# Altium PCB EEPROM_Programmer.PcbDoc
Units mil, origin at the board's own origin, x right, y up, seen from the top; angles counter-clockwise.
Board outline 1655 x 1780 mil, 2 copper layers (Top Layer, Bottom Layer); 4 components, 31 nets, 90 pads, 11 vias.
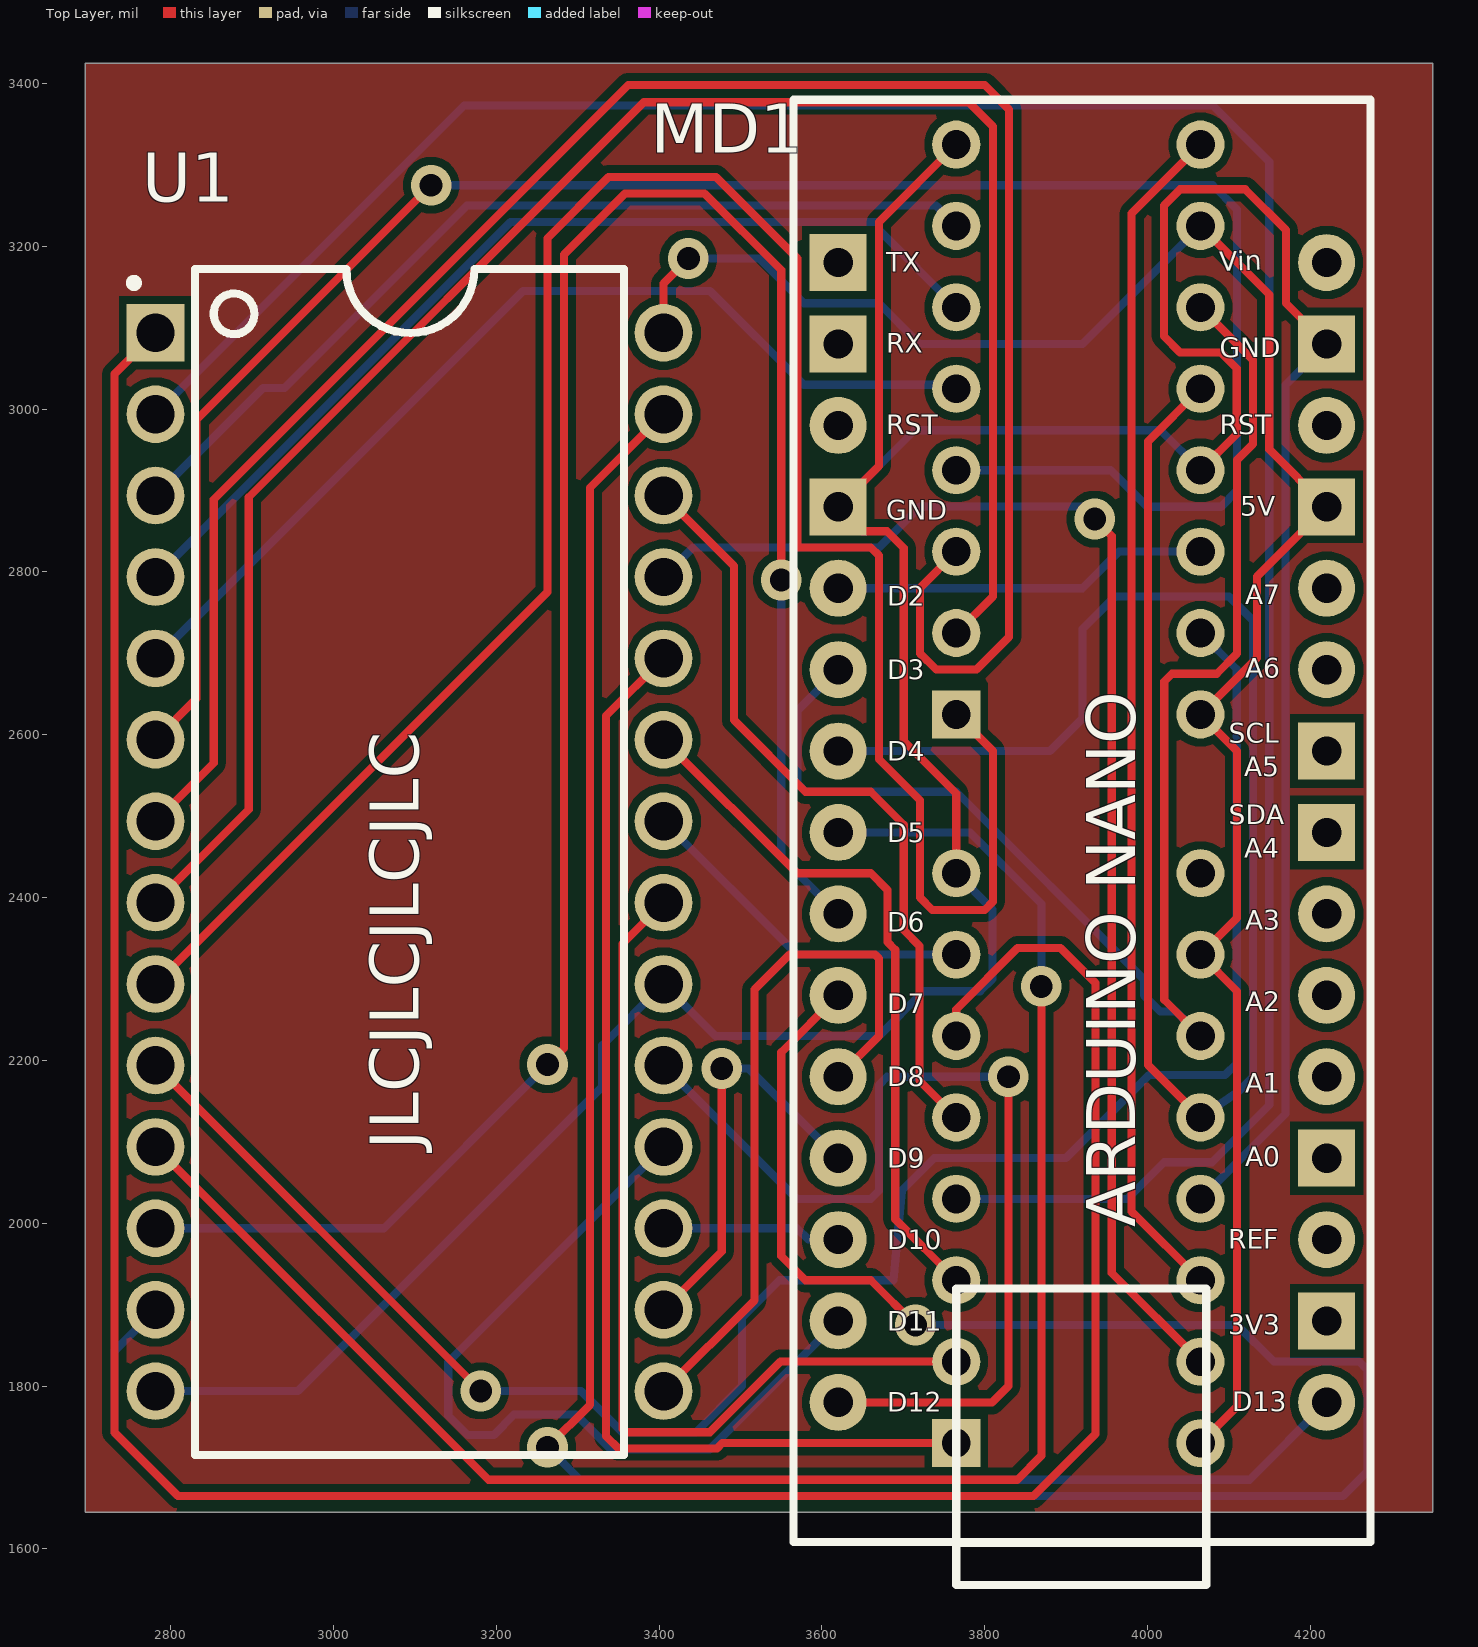
[diagram p0: Top Layer view]
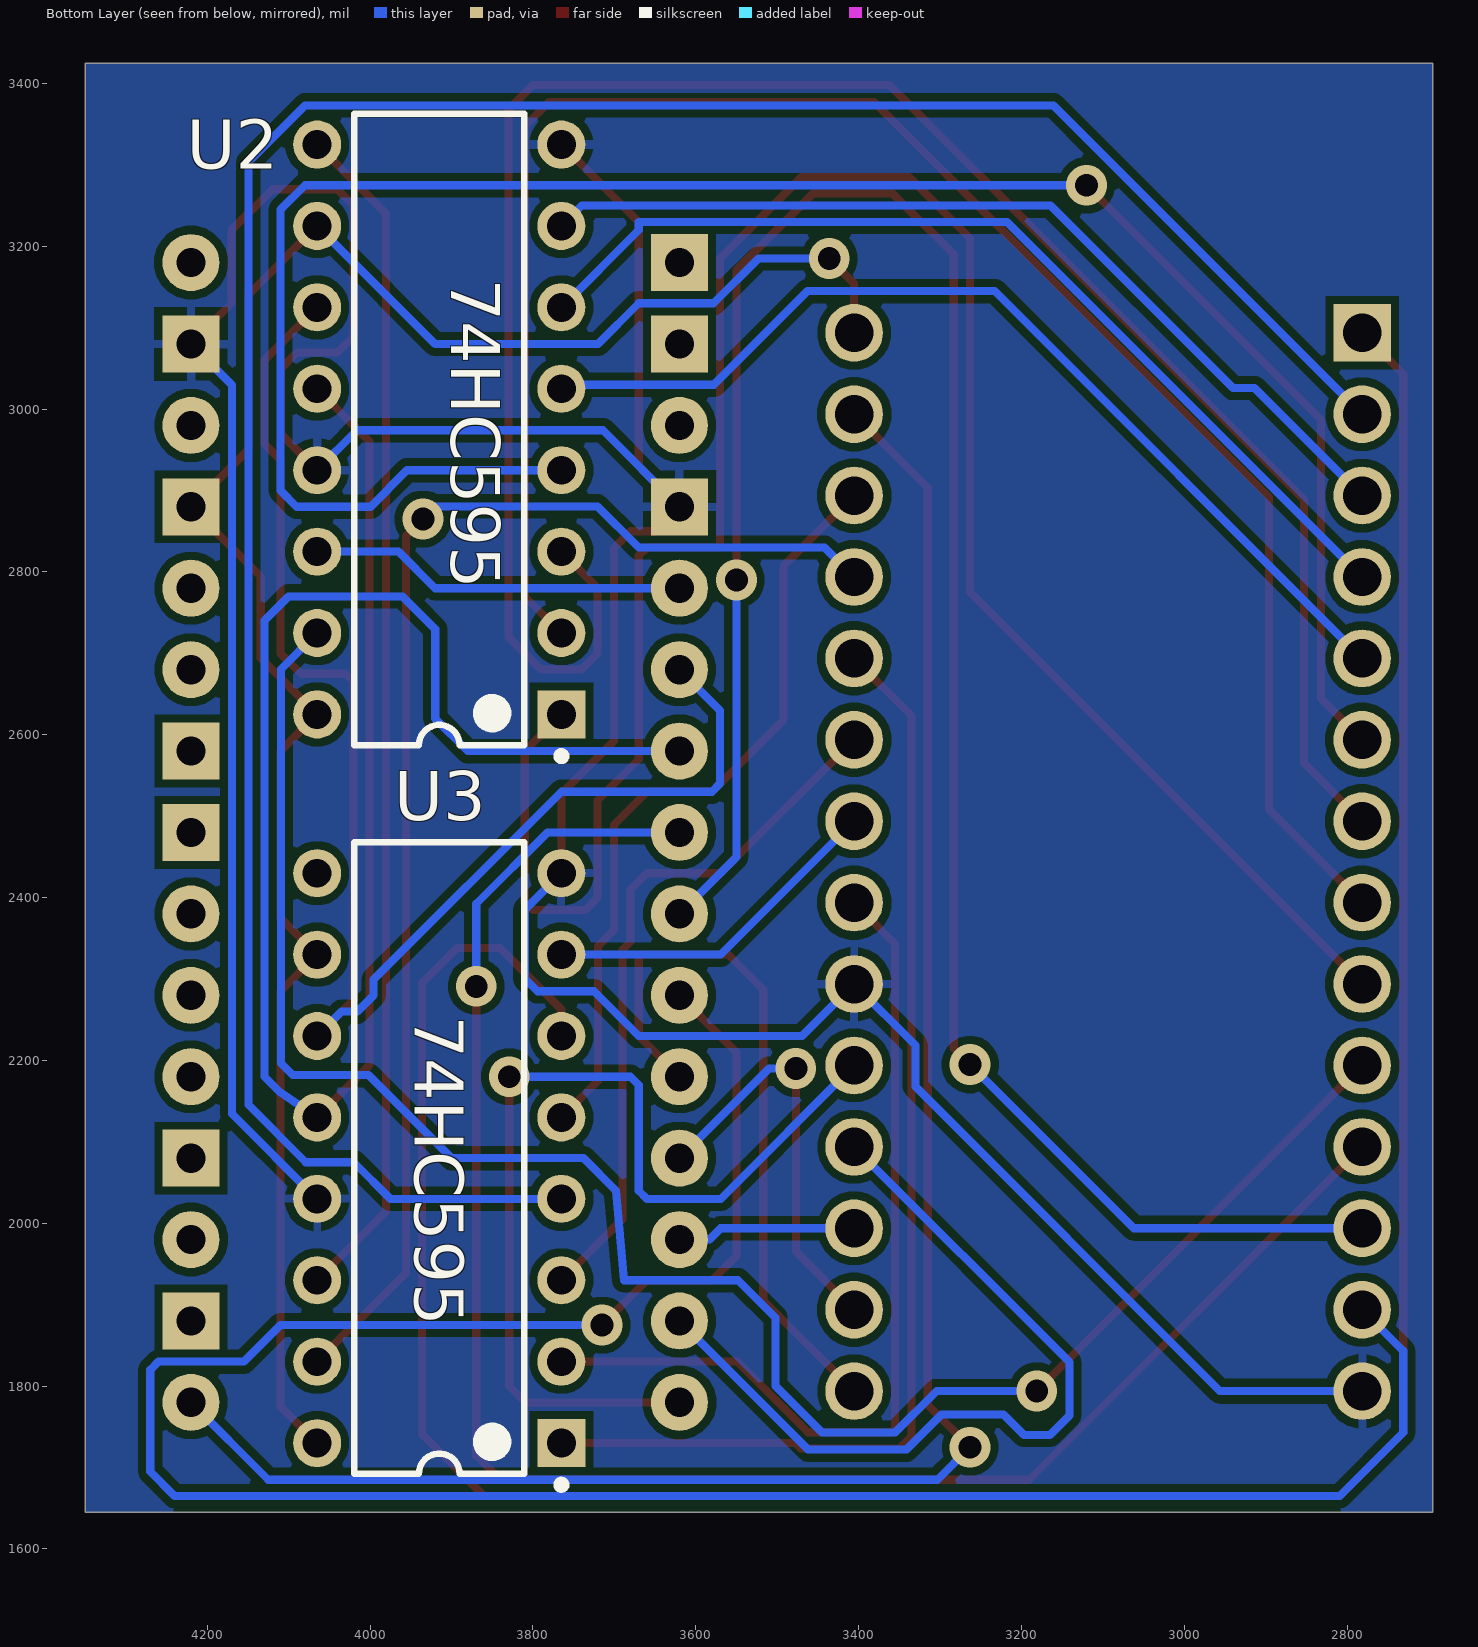
[diagram p1: Bottom Layer view, seen from below]

## Layer stack, top to bottom
Top Solder: solder mask 0.4, Solder Resist, Dk 3.5
Top Layer: signal copper 1.4
Dielectric 1: dielectric 12.6, FR-4, Dk 4.8
Bottom Layer: signal copper 1.4
Bottom Solder: solder mask 0.4, Solder Resist, Dk 3.5

## Board outline
2695,1645 2695,3425 4350,3425 4350,1645

## Design rules (kind name [scope] priority, off if disabled: settings)
Clearance [All] p1: gap=10 ignorepadtopadclearanceinfootprint=FALSE except(0: Arc-Hole Track-Hole SMDPad-Hole THPad-Hole Via-Hole Fill-Hole Poly-Hole Region-Hole Text-Hole)
PolygonConnect [All] p1: connectstyle=Relief reliefconductorwidth=10 reliefentries=4 polygonreliefangle="90 Angle" airgapwidth=10
RoomDefinition EEPROM_Programmer [InComponentClass('EEPROM_Programmer')] p1: confinementstyle=ConfineIn formatcopy=TRUE lockcomponents=FALSE outline 2695,1490 4350.45,1490 4350.45,3425 2695,3425
RoutingVias [All] p1: holewidth=28 width=50 viastyle="Through Hole" minholewidth=28 minwidth=50 maxholewidth=28 maxwidth=50
SolderMaskExpansion SolderMaskExpansion_1 [IsVia] p1: expansion=4 istentingtop=TRUE
SolderMaskExpansion [All] p2: expansion=4 istentingtop=FALSE
Width [All] p1: maxlimit=10 minlimit=10 preferedwidth=10
30 further rules are at their usual default settings.

## Classes and differential pairs
component class EEPROM_Programmer: MD1 U2 U3

## Components (designator, comment, footprint, x,y, rotation, side; value= is the part's Value field where it differs from the comment)
MD1 "Arduino Nano" ARDUINO_NANO 3915,2490 r0 top
U1 "AT28C256" DIP_28 3085,2465 r270 top
U2 "SN74HC595N" N0016A 3915,2975 r0 bottom
U3 "SN74HC595N" N0016A 3915,2080 r0 bottom

## Footprints (in the part's own frame and the unit in brackets; to place one, negate y for a bottom-side part, rotate by r counter-clockwise, add the part's x,y. Pads: shape width x height; smd on the part's side, far side on the other; paste and mask are expansions set on the pad)
ARDUINO_NANO [mil]
  rect 70x70 hole 36: 1(-295,690) 2(-295,590) 4(-295,390) 17(305,-610) 19(305,-410) 23(305,-10) 24(305,90) 27(305,390) 29(305,590)
  round 70 hole 36: 3(-295,490) 5(-295,290) 6(-295,190) 7(-295,90) 8(-295,-10) 9(-295,-110) 10(-295,-210) 11(-295,-310) 12(-295,-410) 13(-295,-510) 14(-295,-610) 15(-295,-710) 16(305,-710) 18(305,-510) 20(305,-310) 21(305,-210) 22(305,-110) 25(305,190) 26(305,290) 28(305,490) 30(305,690)
  silkscreen extent -350,-934 359,890, body extent -351,-935 361,890, height 433
DIP_28 [mm]
  rect 1.8x1.8 hole 1.2: 1(-15.972,-7.71)
  round 1.8 hole 1.2: 2(-13.432,-7.71) 3(-10.892,-7.71) 4(-8.352,-7.71) 5(-5.812,-7.71) 6(-3.272,-7.71) 7(-0.732,-7.71) 8(1.808,-7.71) 9(4.348,-7.71) 10(6.888,-7.71) 11(9.428,-7.71) 12(11.968,-7.71) 13(14.508,-7.71) 14(17.048,-7.71) 15(17.048,8.139) 16(14.508,8.139) 17(11.968,8.139) 18(9.428,8.139) 19(6.888,8.139) 20(4.348,8.139) 21(1.808,8.139) 22(-0.732,8.139) 23(-3.272,8.139) 24(-5.812,8.139) 25(-8.352,8.139) 26(-10.892,8.139) 27(-13.432,8.139) 28(-15.972,8.139)
  silkscreen extent -17.96,-8.51 19.04,6.91, body extent -18.67,-6.42 19.43,6.93, height 4.83
N0016A [mm] "DIP, 16-Leads, Body 19.7x6.6mm, Pitch 2.54mm"
  rect 1.5x1.5 hole 0.9: 1(-3.81,8.89)
  round 1.5 hole 0.9: 2(-3.81,6.35) 3(-3.81,3.81) 4(-3.81,1.27) 5(-3.81,-1.27) 6(-3.81,-3.81) 7(-3.81,-6.35) 8(-3.81,-8.89) 9(3.81,-8.89) 10(3.81,-6.35) 11(3.81,-3.81) 12(3.81,-1.27) 13(3.81,1.27) 14(3.81,3.81) 15(3.81,6.35) 16(3.81,8.89)
  silkscreen extent -3.93,-9.85 2.65,10.31, body extent -3.95,-9.85 3.95,9.85, height 5.08

## Part data
MD1: library part Arduino_Nano, "Arduino Nano board"
U1: "Paged Parallel EEPROM AT28C256"
U2 U3: library part CMP-0780-00137-3, "8-Bit Shift Registers With 3-State Output Registers, N0016A, TUBE", F @ Nom Voltage(Max)(Mhz)=28, Generic Part Number=SN74HC595, ICC @ Nom Voltage(Max)(mA)=0.08, Manufacturer="Texas Instruments", Operating Temperature Range(C)="-40 to 85", Rating=Military, tpd @ Nom Voltage(Max)(ns)=34, Voltage(Nom)(V)=6, 3-State Output=Yes, Bits=8, Code_JEDEC=MS-001, DatasheetVersion=SCLS041H, Input Type=CMOS, Output Drive (IOL/IOH)(Max)(mA)=7.8/-7.8, Output Type=CMOS, PackageReference=N0016A, PackageVersion=http://www.ti.com/lit/ml/mpdi002c/mpdi002c.pdf, Technology Family=HC, VCC(Max)(V)=6, VCC(Min)(V)=2

## Via types
v1: diameter 50, hole 28, Top Layer to Bottom Layer, tented both sides, 11 vias

## Nets (pads, with @x,y where several pads share a name; then routed paths per layer and width w, separated by ;. In a path a pad name is that pad's centre, name@x,y a point inside that pad or via, vN(x,y) a via of type N, cw(c..) or ccw(c..) an arc to the next point about the centre after c; other vN are vias at no path point)
+5: MD1.27 U1.28 U2.10 U2.16 U3.10 U3.16 | length 2534.4
  Top Layer w10: U1.28 3405.45,3154.45 v1(3436,3185) ; U3.16 4110,1775 4110,2285 U3.10 4110,2375 4110,2580 U2.16 4134.26,2694.26 4134.26,2794.26 MD1.27 4149.53,2950.47 4149.53,3140.47 U2.10
  Bottom Layer w10: v1(3436,3185) 3523,3185 3578,3130 3670,3130 3720,3080 3920,3080 U2.10
D0: MD1.8 U1.11 | length 2233.4
  Top Layer w10: U1.11 3190.29,1685 3840,1685 3869.53,1714.53 v1(3869.53,2291)
  Bottom Layer w10: MD1.8 3782,2480 3869.53,2392.47 v1(3869.53,2291)
D1: MD1.9 U1.12 | length 2725.1
  Top Layer w10: v1(3263,2195) 3283,2215 3283,3189.92 3358.08,3265 3456,3265 3550,3171 v1(3550,2790)
  Bottom Layer w10: U1.12 3061.82,1993.82 v1(3263,2195) ; v1(3550,2790) 3550,2450 MD1.9
D2: MD1.10 U1.13 | length 3007.4
  Top Layer w10: MD1.10 3550,2210 3550,1960 3580,1930 3660,1930 v1(3715,1875)
  Bottom Layer w10: U1.13 2731,1843.35 2731,1743 2809,1665 4240,1665 4270,1695 4270,1820 4260,1830 4155,1830 4110,1875 v1(3715,1875)
D3: MD1.11 U1.15 | length 878
  Top Layer w10: U1.15 3517,1905.37 3517,2287 3560,2330 3665,2330 3670,2325 3670,2230 MD1.11
D4: MD1.12 U1.16 | length 514.4
  Top Layer w10: U1.16 3477,1965.37 v1(3477,2190)
  Bottom Layer w10: v1(3477,2190) 3510,2190 MD1.12
D5: MD1.13 U1.17 | length 220.3
  Bottom Layer w10: U1.17 3569.47,1993.82 3583.29,1980 MD1.13
D6: MD1.14 U1.18 | length 1021.9
  Bottom Layer w10: U1.18 3141,1829.37 3141,1764 3165,1740 3197,1740 3222,1765 3298,1765 3341,1722 3462,1722 MD1.14
D7: MD1.15 U1.19 | length 1227
  Top Layer w10: MD1.15 3809,1780 3829,1800 v1(3829,2180)
  Bottom Layer w10: U1.19 3569.27,2030 3660,2030 3670,2040 3670,2170 3680,2180 v1(3829,2180)
GND: MD1.4 MD1.29 U1.14 U1.20 U2.8 U2.13 U3.8 U3.13 | length 4869.5
  Top Layer w10: U3.8 3765,2527.89 3700.47,2592.42 3700.47,2829.53 3680,2850 3650,2850 MD1.4 3670,2930 3670,3230 U2.8 ; U2.13 4109.53,2969.53 4109.53,3050 4090,3069.53 4040,3069.53 4020,3089.53 4020,3250 4040,3270 4120,3270 4170,3220 4170,3130 MD1.29
  Bottom Layer w10: U1.14 2956.32,1793.82 3330.27,2167.77 3330.27,2218.64 U1.20 3469.27,2230 3670,2230 3725,2285 3794.53,2285 3809.53,2300 3809.53,2385.47 U3.8 ; MD1.4 3714,2974 4016,2974 U2.13 ; U3.13 4169.53,2134.53 4169.53,3029.53 MD1.29
NetU1_1: U1.1 U3.6 | length 3447.2
  Top Layer w10: U1.1 2731,3043.37 2731,1743 2809,1665 3860,1665 3936,1741 3936,2295 3893,2338 3840.26,2338 3765,2262.74 U3.6
NetU1_2: U1.2 U3.4 | length 3144.2
  Bottom Layer w10: U1.2 3160.65,3373 4080,3373 4149.53,3303.47 4149.53,2145.53 4079,2075 4020,2075 3975,2030 U3.4
NetU1_3: U1.3 U2.7 | length 1141.4
  Bottom Layer w10: U1.3 2913.56,3025.91 2940,3025.91 3164.09,3250 3740,3250 U2.7
NetU1_4: U1.4 U2.6 | length 1213.6
  Bottom Layer w10: U1.4 3217.65,3230 3670,3230 3670,3220 U2.6
NetU1_5: U1.5 U2.5 | length 1223
  Bottom Layer w10: U1.5 3232.65,3145 3462.63,3145 3577.63,3030 3765,3030 U2.5
NetU1_6: U1.6 U2.4 | length 2540.8
  Top Layer w10: U1.6 2832,2644.35 2832,2987 v1(3120,3275)
  Bottom Layer w10: v1(3120,3275) 4080,3275 4110,3245 4110,2900 4090,2880 3999.67,2880 3954.67,2925 U2.4
NetU1_7: U1.7 U2.3 | length 2550.9
  Top Layer w10: U1.7 2853,2565.35 2853,2888.92 3362.08,3398 3800,3398 3830,3368 3830,2720 3790,2680 3740.47,2680 3720.47,2700 3720.47,2780.47 U2.3
NetU1_8: U1.8 U2.2 | length 2313.4
  Top Layer w10: U1.8 2896,2508.35 2896,2891.76 3381.24,3377 3780,3377 3810,3347 3810,2770 U2.2
NetU1_9: U1.9 U2.1 | length 2743.7
  Top Layer w10: U1.9 3263,2775.35 3263,3209.92 3338.08,3285 3470,3285 3570,3185 3570,2830 3660,2830 3670,2820 3670,2570 3720.47,2519.53 3720.47,2400 3735.47,2385 3800,2385 3810,2395 3810,2580 U2.1
NetU1_10: U1.10 U2.15 | length 2353.8
  Top Layer w10: U1.10 3181,1794.29 v1(3181,1794)
  Bottom Layer w10: v1(3181,1794) 3304,1794 3355,1743 3445,1743 3502,1800 3502,1884 3548,1930 3688,1930 3698,2040 3738,2080 3900,2080 4002,2182 4095,2182 4109.53,2196.53 4109.53,2680.47 U2.15
NetU1_21: U1.21 U3.2 | length 1114.9
  Top Layer w10: U1.21 3355.02,2343.39 3355.02,1747.37 3359,1743.39 3462.39,1743.39 3549,1830 U3.2
NetU1_22: U1.22 U3.7 | length 427.4
  Bottom Layer w10: U1.22 3569.27,2330 U3.7
NetU1_23: U1.23 U3.3 | length 865.9
  Top Layer w10: U1.23 3569.27,2430 3660,2430 3680.47,2409.53 3680.47,2345.47 3690,2335.94 3690,2005 U3.3
NetU1_24: U1.24 U3.1 | length 1423.6
  Top Layer w10: U1.24 3335.02,2623.39 3335.02,1738.37 3350,1723.39 3471,1723.39 3477.61,1730 U3.1
NetU1_25: U1.25 U3.15 | length 1660.7
  Top Layer w10: v1(3935,2865) 3956,2844 3956,1939 U3.15
  Bottom Layer w10: U1.25 3441.63,2830 3670,2830 3720.47,2880.47 3919.53,2880.47 v1(3935,2865)
NetU1_26: U1.26 U3.5 | length 959.6
  Top Layer w10: U1.26 3492,2807.27 3492,2618 3580,2530 3660,2530 3700.47,2489.53 3700.47,2360 3720,2340.47 3720,2175 U3.5
NetU2_9: U2.9 U3.14 | length 1465
  Top Layer w10: U3.14 3980.47,2014.53 3980.47,3240.47 U2.9
RCLK: MD1.7 U2.12 U3.12 | length 2255.8
  Top Layer w10: U3.12 4000.47,2194.53 4000.47,2960.47 U2.12
  Bottom Layer w10: MD1.7 3880,2580 3920,2620 3920,2730 3960,2770 4100,2770 4129.53,2740.47 4129.53,2180 4111.53,2162 U3.12
SER1: MD1.5 U2.14 | length 463.6
  Bottom Layer w10: MD1.5 3920,2780 3965,2825 U2.14
SRCLK: MD1.6 U2.11 U3.11 | length 1813.1
  Top Layer w10: U3.11 4020.47,2274.53 4020.47,2665.47 4030,2675 4085,2675 4110,2700 4110,2937.74 4129.53,2957.26 4129.53,3060.47 U2.11
  Bottom Layer w10: MD1.6 3570,2630 3570,2540 3580,2530 3765,2530 3995.57,2299.43 3995.57,2280 4015.57,2260 4035,2260 U3.11
WE: MD1.16 U1.27 | length 2340.7
  Top Layer w10: v1(3263,1725) 3315.02,1777.02 3315.02,2903.39 U1.27
  Bottom Layer w10: v1(3263,1725) 3303,1685 4125,1685 MD1.16
pads on no net: MD1.1 MD1.2 MD1.3 MD1.17 MD1.18 MD1.19 MD1.20 MD1.21 MD1.22 MD1.23 MD1.24 MD1.25 MD1.26 MD1.28 MD1.30 U3.9

## Polygon pours and split planes (outlines as drawn)
no net on Top Layer "NONET_L01_P001" (solid, pour order 1): 2695,3425 2695,1645 4350,1645 4350,3425
GND on Bottom Layer "GND_L02_P000" (solid, pour order 0): 2695,3425 2695,1645 4350,1645 4350,3425

## Silkscreen, mask and mechanical layers (free items; w line width, h text height)
Top Overlay:
  text "JLCJLCJLCJLC" at 3105,2090 h60 r90
  text "ARDUINO NANO" at 3985,1995 h60 r90
Bottom Overlay:
  text "74HC595" at 3900,3160 h60 r90
  text "74HC595" at 3945,2255 h60 r90
Mechanical 6:
  the board outline again, w2.7

## Text inside footprints (layer, text, board x,y; h text height)
MD1: Top Overlay "A1" at 4120,2160.29 h23.62; Top Overlay "SDA" at 4100,2490.29 h23.62; Top Overlay "SCL" at 4100,2590.29 h23.62; Top Overlay "D13" at 4103.94,1768.94 h23.62; Top Overlay "3V3" at 4098.94,1863.94 h23.62; Top Overlay "REF" at 4098.94,1968.94 h23.62; Top Overlay "A0" at 4120,2070.29 h23.62; Top Overlay "A2" at 4120,2260.29 h23.62; Top Overlay "A3" at 4120,2360.29 h23.62; Top Overlay "A4" at 4118.94,2448.94 h23.62; Top Overlay "A5" at 4118.94,2548.94 h23.62; Top Overlay "A6" at 4120,2670.29 h23.62; Top Overlay "A7" at 4120,2760.29 h23.62; Top Overlay "5V" at 4113.94,2868.94 h23.62; Top Overlay "RST" at 4088.94,2968.94 h23.62; Top Overlay "GND" at 4088.94,3063.94 h23.62; Top Overlay "Vin" at 4088.8,3169.07 h23.62 r2; Top Overlay "D12" at 3680,1768.19 h23.62; Top Overlay "D11" at 3680,1868.19 h23.62; Top Overlay "D10" at 3680,1968.19 h23.62; Top Overlay "D9" at 3680,2068.19 h23.62; Top Overlay "D8" at 3680,2168.19 h23.62; Top Overlay "D7" at 3680,2258.19 h23.62; Top Overlay "D6" at 3680,2358.19 h23.62; Top Overlay "D5" at 3680,2468.19 h23.62; Top Overlay "D4" at 3680,2568.19 h23.62; Top Overlay "D3" at 3680,2668.19 h23.62; Top Overlay "D2" at 3680,2758.19 h23.62; Top Overlay "GND" at 3678.94,2863.94 h23.62; Top Overlay "RST" at 3678.94,2968.94 h23.62; Top Overlay "TX" at 3678.94,3168.94 h23.62; Top Overlay "RX" at 3678.94,3068.94 h23.62